# Altium PCB BaseBoard.PcbDoc
Units mm, origin at the board's own origin, x right, y up, seen from the top; angles counter-clockwise.
Board outline 100 x 99.75 mm, 2 copper layers (Top Layer, Bottom Layer), stack 1.57 mm thick; 52 components, 53 nets, 219 pads, 281 vias.
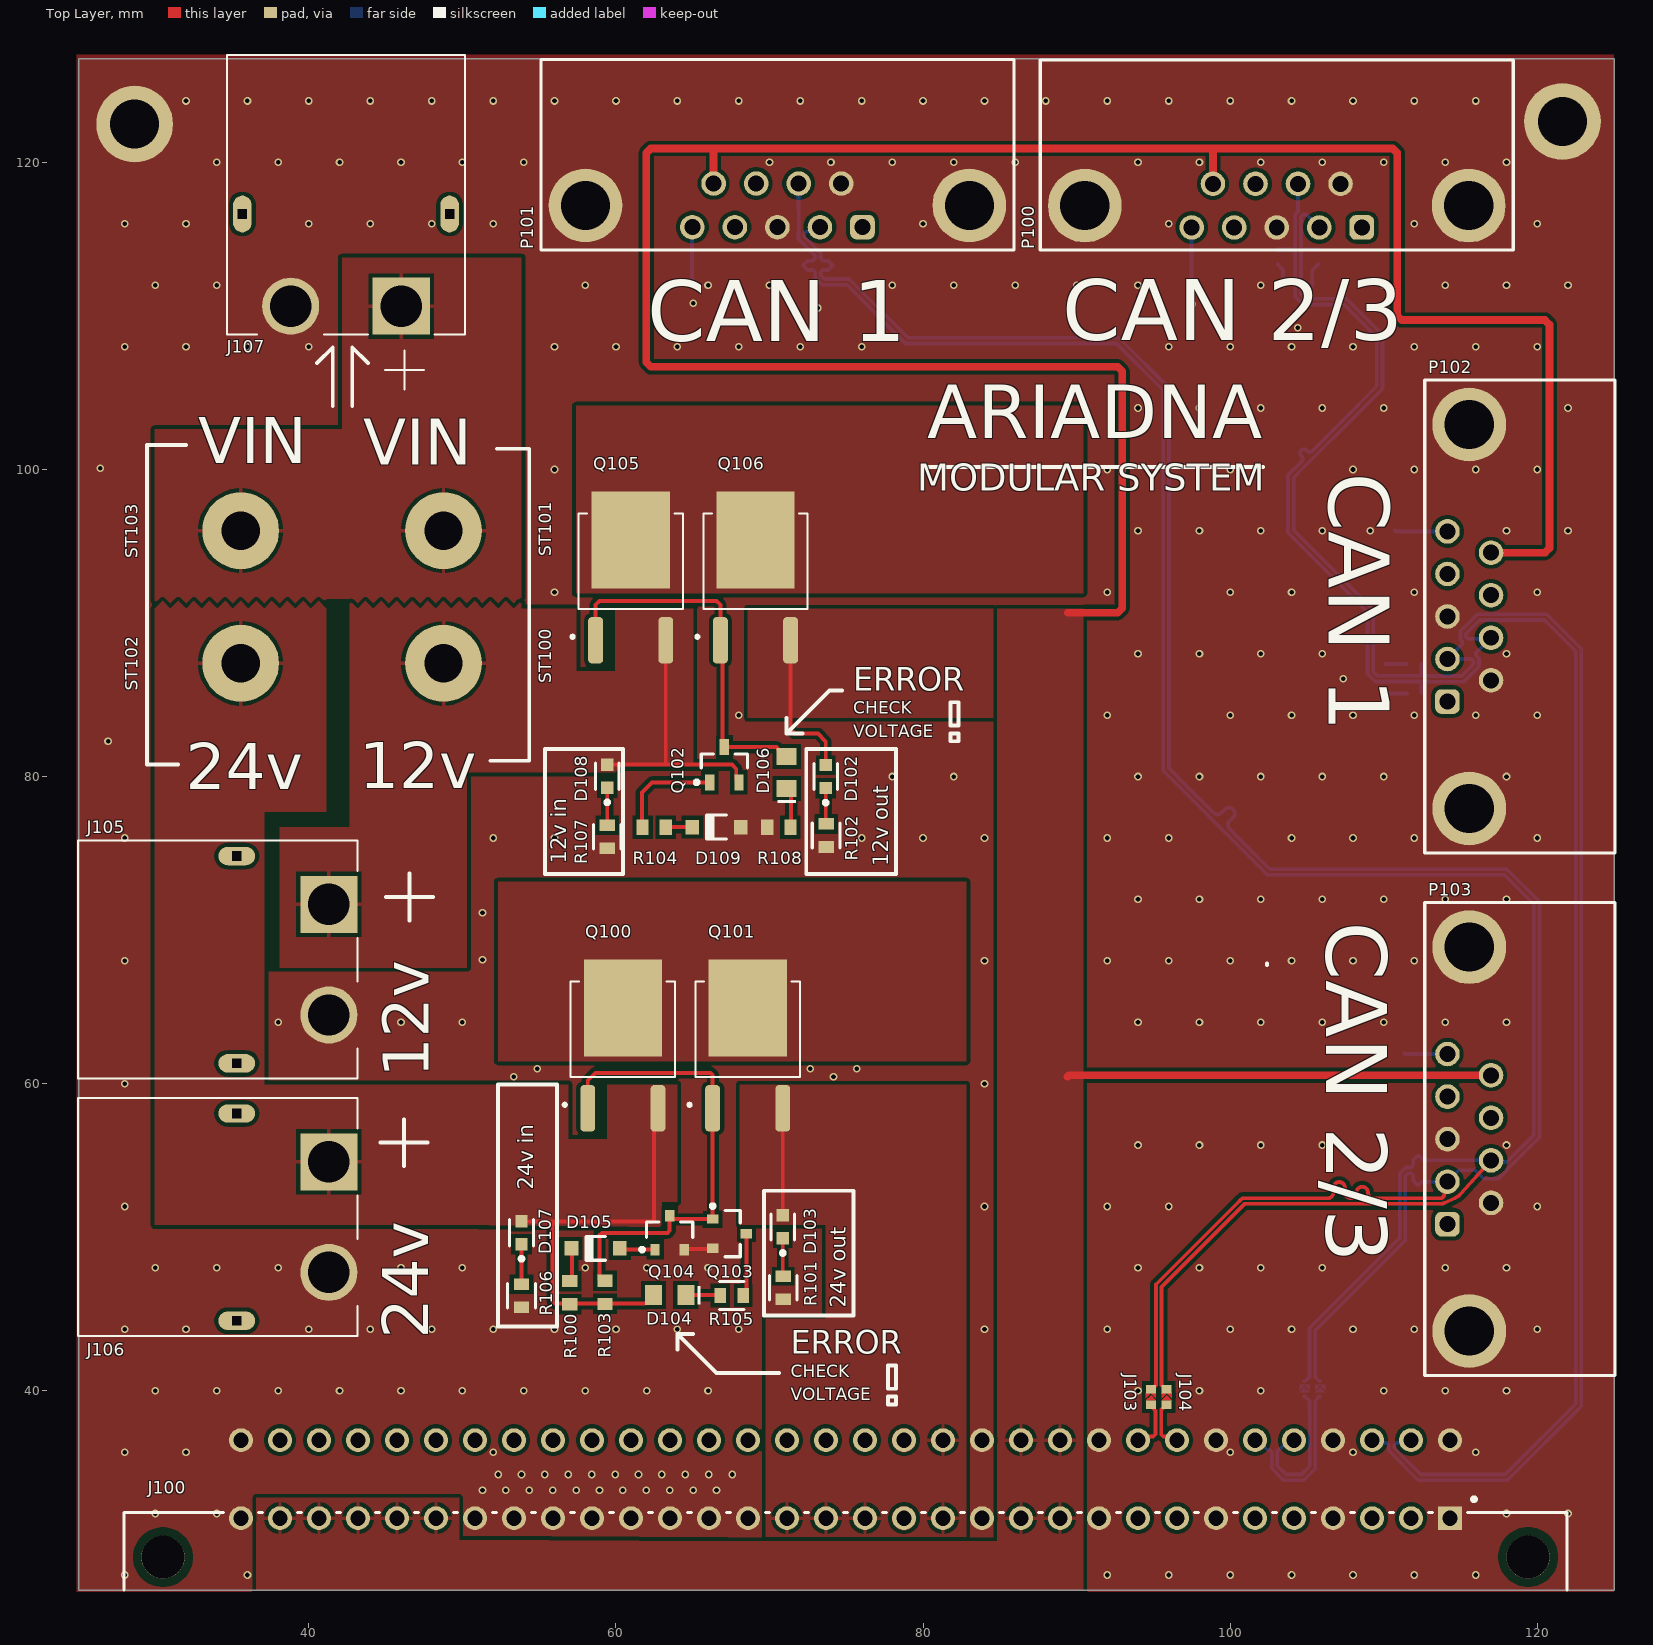
[diagram p0: Top Layer view]
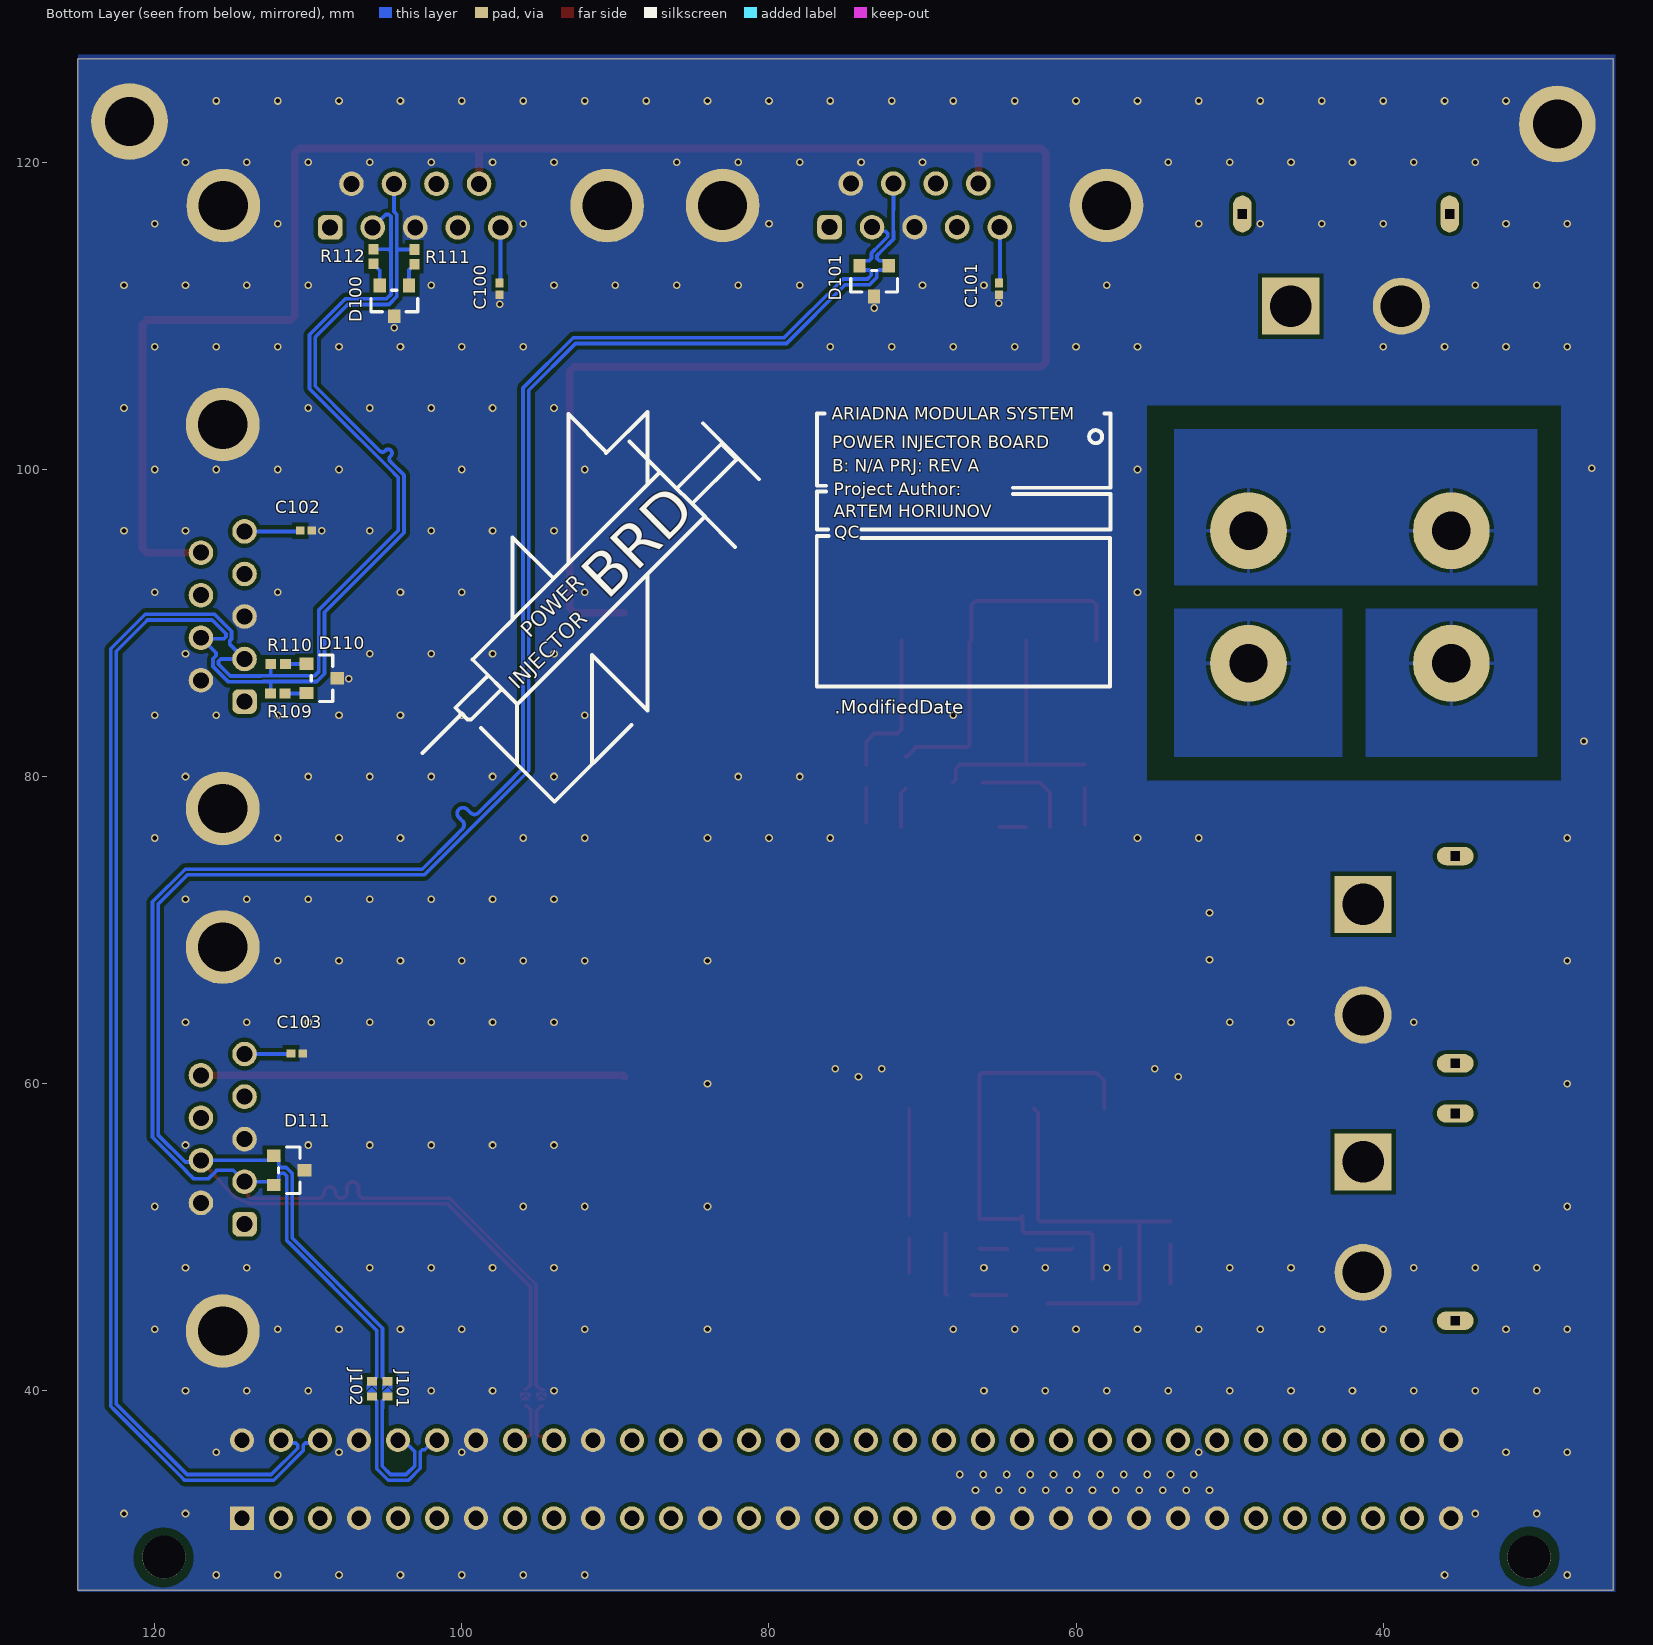
[diagram p1: Bottom Layer view, seen from below]
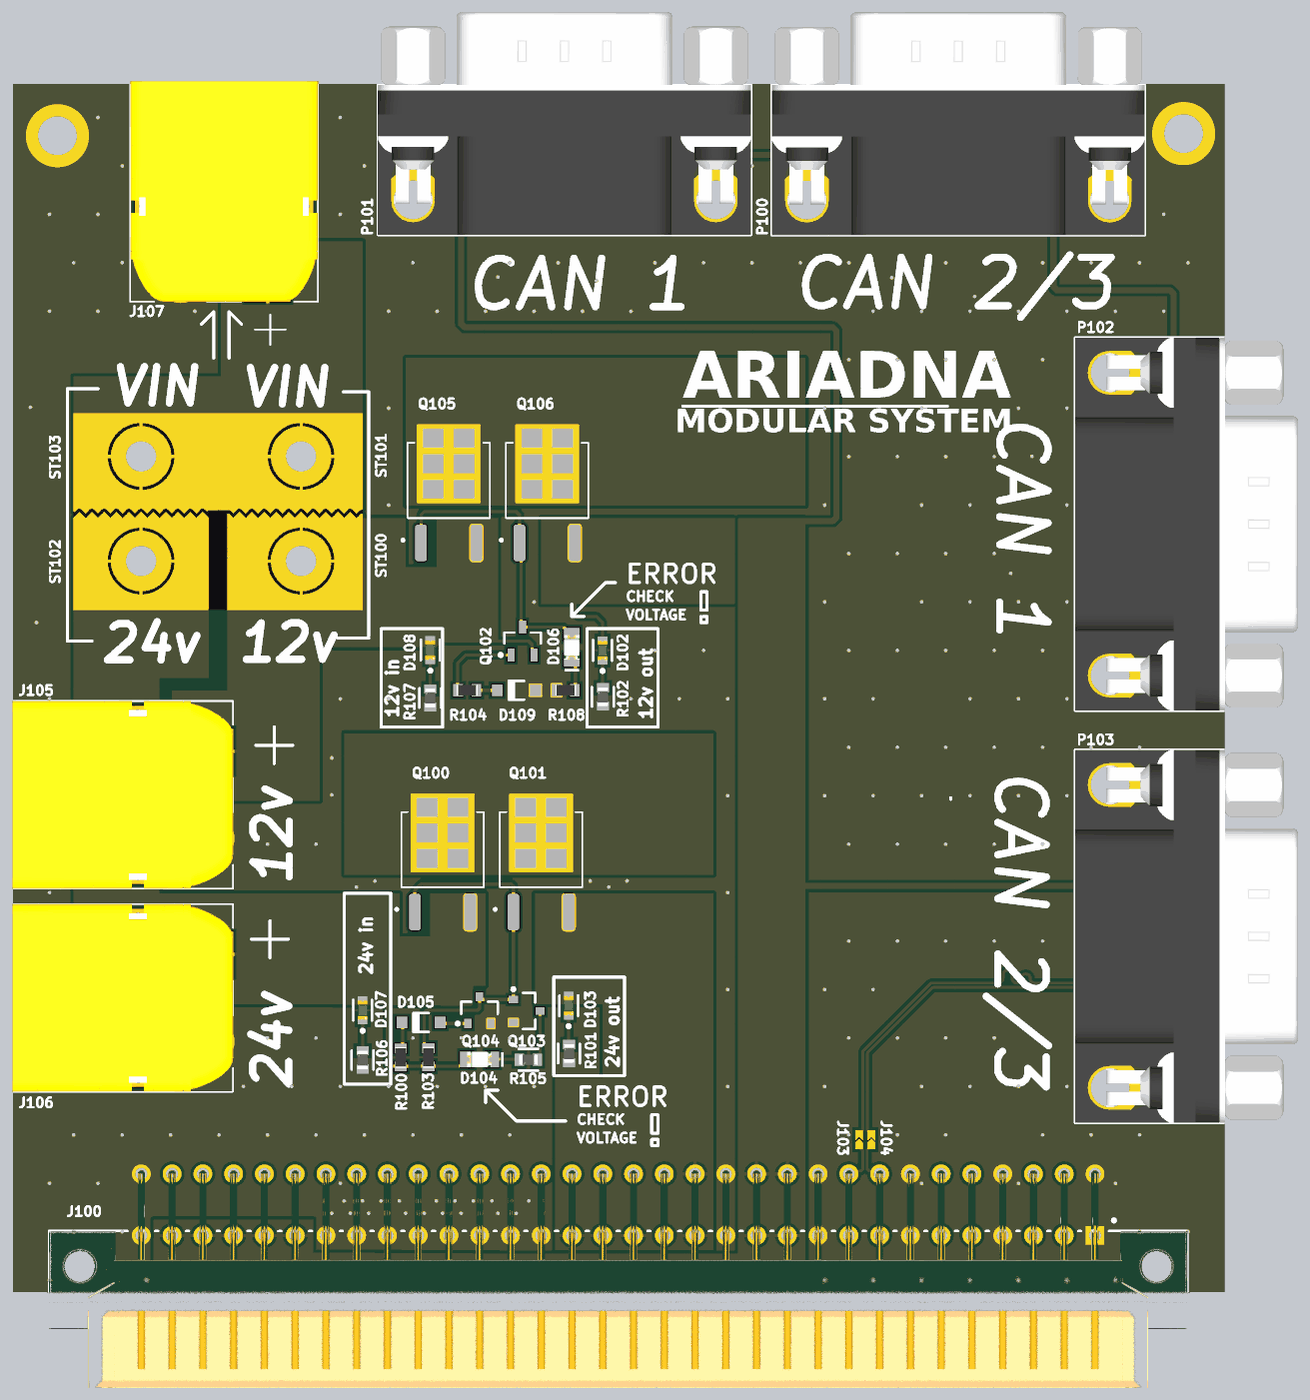
[diagram p2: 3D render of the assembled board from above, using the file's embedded part models]
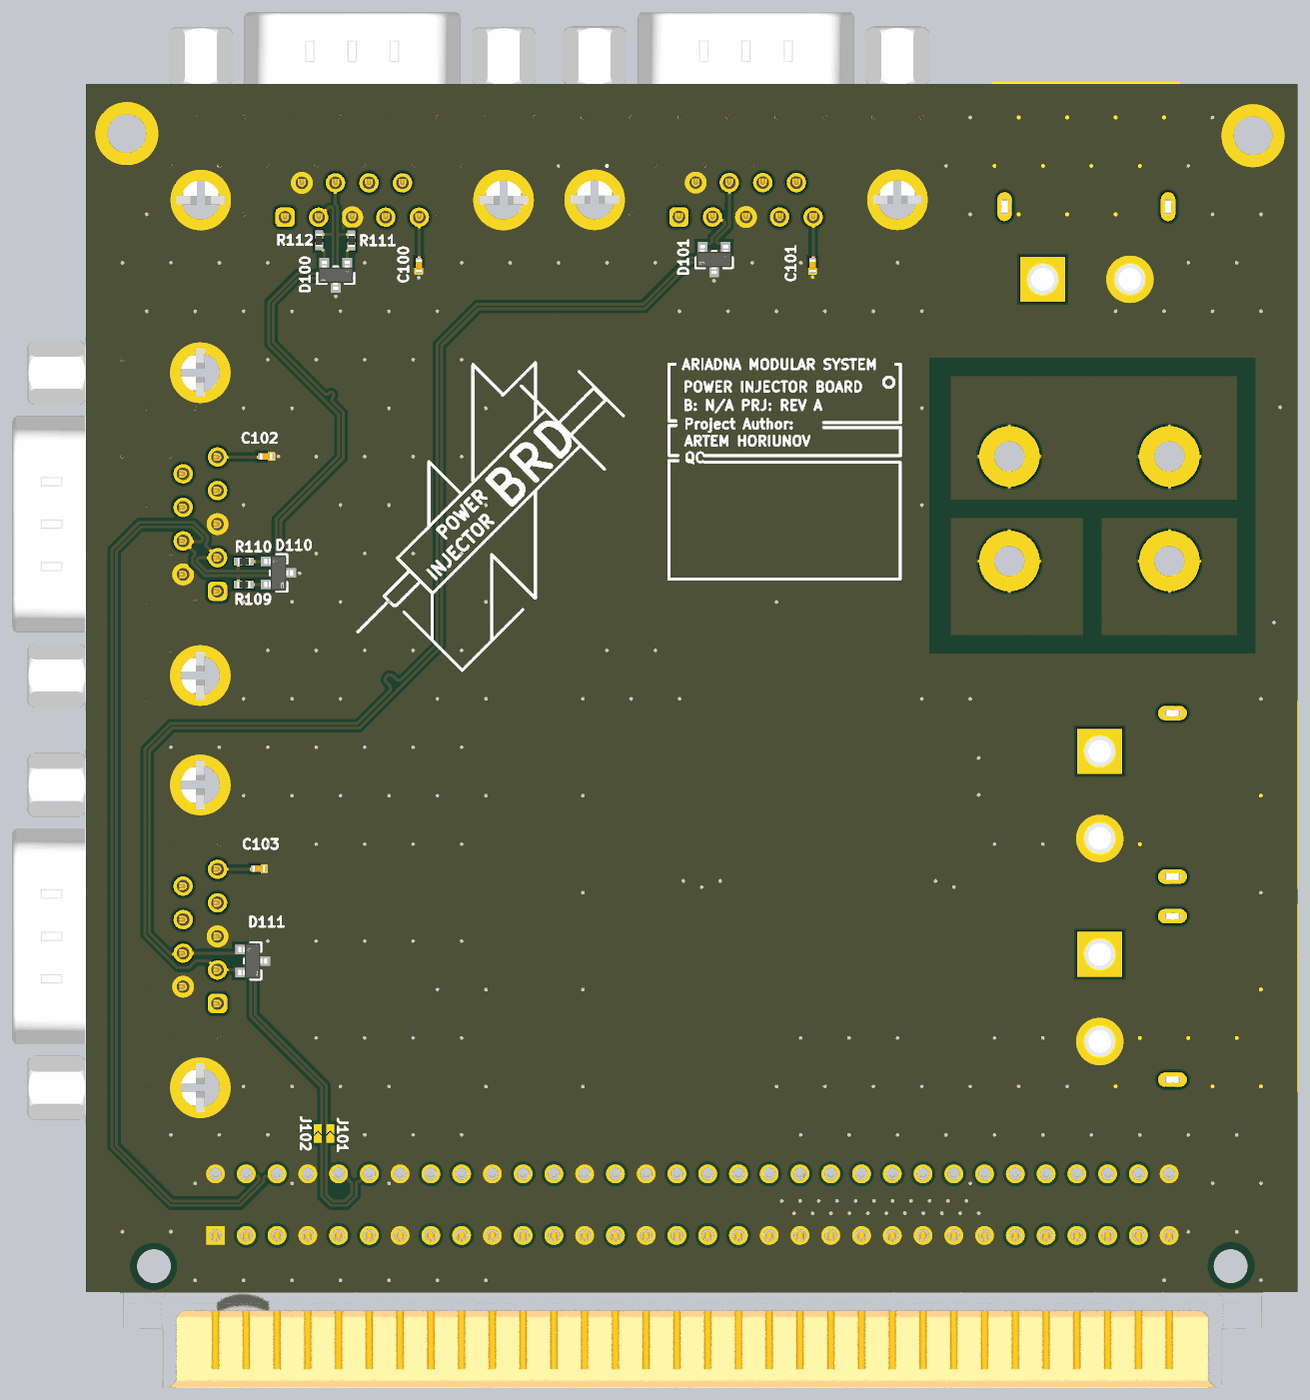
[diagram p3: 3D render of the assembled board from below, using the file's embedded part models]

## Layer stack, top to bottom
Top Solder: solder mask 0.0127, Solder Resist, Dk 3.8
Top Layer: signal copper 0.035
Dielectric: core 1.5, FR-4, Dk 4.5
Bottom Layer: signal copper 0.035
Bottom Solder: solder mask 0.0127, Solder Resist, Dk 3.8

## Board outline
25,27 125,27 125,126.746 25,126.746

## Design rules (kind name [scope] priority, off if disabled: settings)
Clearance [All] p1: gap=0.254 ignorepadtopadclearanceinfootprint=TRUE except(0: Arc-Hole Track-Hole SMDPad-Hole THPad-Hole Via-Hole Fill-Hole Poly-Hole Region-Hole Text-Hole; 0.127: Arc-Arc Arc-Track Track-Track SMDPad-SMDPad; 0.2: Arc-SMDPad Track-SMDPad; 0.5: THPad-THPad)
DiffPairsRouting USB [All] p1: maxlimit=0.127 minlimit=0.127 mostfreqgap=0.127 toplayer_minwidth=0.24 toplayer_maxwidth=0.24 toplayer_prefwidth=0.24 bottomlayer_minwidth=0.24 bottomlayer_maxwidth=0.24 bottomlayer_prefwidth=0.24 impedanceprofiledriven=TRUE maxuncoupledlength=12.7
DiffPairsRouting CAN [All] p2: maxlimit=0.127 minlimit=0.127 mostfreqgap=0.127 toplayer_minwidth=0.123 toplayer_maxwidth=0.123 toplayer_prefwidth=0.123 bottomlayer_minwidth=0.123 bottomlayer_maxwidth=0.123 bottomlayer_prefwidth=0.123 impedanceprofiledriven=TRUE impedanceprofileid={9E27E0D8-7AC4-4884-A1A0-CA4D147F4CC9} impedanceprofilevalue=120.000000 maxuncoupledlength=12.7
HoleSize [All] p1: absolutevalues=TRUE maxlimit=6.3 minlimit=0.3 maxpercent=80.000 minpercent=20.000
MinimumSolderMaskSliver [All] p1: minsoldermaskwidth=0.127
PolygonConnect GND_polygon [InNet('GND')] p1: connectstyle=Direct reliefconductorwidth=0.254 reliefentries=4 polygonreliefangle="90 Angle" airgapwidth=0.254
PolygonConnect "STM32-no releaf" [HasFootprint('STM-LQFP64_M')] p2: connectstyle=Direct reliefconductorwidth=0.254 reliefentries=4 polygonreliefangle="90 Angle" airgapwidth=0.254
PolygonConnect [All] p3: thpad.connectstyle=Relief thpad.reliefconductorwidth=0.254 thpad.reliefentries=4 thpad.polygonreliefangle="90 Angle" thpad.airgapwidth=0.254 smdpad.connectstyle=Direct smdpad.reliefconductorwidth=0.254 smdpad.reliefentries=4 smdpad.polygonreliefangle="90 Angle" smdpad.airgapwidth=0.254 via.connectstyle=Direct via.reliefconductorwidth=0.254 via.reliefentries=4 via.polygonreliefangle="90 Angle" via.airgapwidth=0.254
RoutingVias [All] p1: holewidth=0.3 width=0.5 viastyle="Through Hole" minholewidth=0.3 minwidth=0.5 maxholewidth=0.5 maxwidth=0.7
SilkToSilkClearance [All] p1: silktosilkclearance=0.001
SilkToSolderMaskClearance [IsPad] p1: minsilkscreentomaskgap=0.1 clearancetoexposedcopper=TRUE
SolderMaskExpansion SolderMaskExpansion_Vias [IsVia] p1: expansion=0.102 istentingtop=TRUE
SolderMaskExpansion [All] p2: expansion=0.102 istentingtop=FALSE
SupplyNets "Schematic Supply Nets_8" [InNet('Unprotec 24v')] p1: voltage=0.000
SupplyNets "Schematic Supply Nets_7" [InNet('Unprotec 12v')] p2: voltage=0.000
SupplyNets "Schematic Supply Nets_3" [InNet('GND')] p3: voltage=0.000
SupplyNets "Schematic Supply Nets_2" [InNet('+12')] p4: voltage=0.000
SupplyNets "Schematic Supply Nets_1" [InNet('12v')] p5: voltage=0.000
SupplyNets "Schematic Supply Nets" [InNet('24v')] p6: voltage=0.000
Width [All] p1: maxlimit=2.54 minlimit=0.254 preferedwidth=0.5 minimp=50.000000 maximp=50.000000 favimp=50.000000
25 further rules are at their usual default settings.

## Classes and differential pairs
differential pair class CAN: CAN1 CANSW
differential pair CANSW: +CANSW_P -CANSW_N
differential pair CAN3: +CAN3_P -CAN3_N
differential pair CAN2: +CAN2_P -CAN2_N
differential pair CAN1: +CAN1_P -CAN1_N

## Components (designator, comment, footprint, x,y, rotation, side; value= is the part's Value field where it differs from the comment)
C100 "Capacitor 10 pF +/- 0.25 pF 50 V 0402" CAPC1005X55X30LL05T10 97.536,111.76 r90 bottom value=10pF
C101 "Capacitor 10 pF +/- 0.25 pF 50 V 0402" CAPC1005X55X30LL05T10 65.024,111.76 r90 bottom value=10pF
C102 "Capacitor 10 pF +/- 0.25 pF 50 V 0402" CAPC1005X55X30LL05T10 110.144,96.012 r0 bottom value=10pF
C103 "Capacitor 10 pF +/- 0.25 pF 50 V 0402" CAPC1005X55X30LL05T10 110.744,61.976 r0 bottom value=10pF
D100 "ESDA6V1L-TP" FP-SOT-23-MFG 104.394,110.973 r270 bottom
D101 "ESDA6V1L-TP" FP-SOT-23-MFG 73.152,112.268 r270 bottom
D102 "Green LED" FP-HSME-C191-MFG 73.66,79.998 r90 top
D103 "Green LED" FP-HSME-C191-MFG 70.866,50.673 r90 top
D104 "Flashing RED" WL-SMCW_0805_150080xx75000 63.5,46.228 r180 top
D105 "BZT52C16-7-F" DIOD-SOD123-2_V 58.674,49.276 r180 top
D106 "Flashing RED" WL-SMCW_0805_150080xx75000 71.12,80.264 r90 top
D107 "Green LED" FP-HSME-C191-MFG 53.848,50.292 r90 top
D108 "Green LED" FP-HSME-C191-MFG 59.436,80.022 r90 top
D109 "BZT52C16-7-F" DIOD-SOD123-2_V 66.548,76.708 r180 top
D110 "ESDA6V1L-TP" FP-SOT-23-MFG 109.109,86.396 r180 bottom
D111 "ESDA6V1L-TP" FP-SOT-23-MFG 111.252,54.356 r180 bottom
J100 "09 03 164 6921" FP-09_03_164_6921-MFG 74.95,25.56 r0 top
J101 "JUMPER" JUMPER 104.845,40.074 r180 bottom
J102 "JUMPER" JUMPER 105.861,40.074 r180 bottom
J103 "JUMPER" JUMPER 95.86,39.548 r0 top
J104 "JUMPER" JUMPER 94.844,39.548 r0 top
J105 "XT60PW-M" AMASS_XT60PW-M 35.306,68.072 r90 top
J106 "XT60PW-M" AMASS_XT60PW-M 35.306,51.308 r90 top
J107 "XT60PW-M" AMASS_XT60PW-M 42.418,116.637 r0 top
P100 "618009231221" 618009231221 103.035,120.48 r180 top
P101 "618009231221" 618009231221 70.515,120.499 r180 top
P102 "618009231221" 618009231221 118.872,90.424 r90 top
P103 "618009231221" 618009231221 118.872,56.388 r90 top
Q100 "AOD417" DPAK228P994X240_3N 60.452,62.484 r0 top
Q101 "AOD417" DPAK228P994X240_3N 68.58,62.484 r0 top
Q102 "BC857C" INF-SOT23_N 67.056,80.772 r90 top
Q103 "BC847C" INF-SOT23_L 67.394,50.226 r0 top
Q104 "BC847C" INF-SOT23_L 63.5,50.292 r90 top
Q105 "AOD417" DPAK228P994X240_3N 60.96,92.964 r0 top
Q106 "AOD417" DPAK228P994X240_3N 69.088,92.964 r0 top
R100 "Resistor 1k +/-1% 0603 100 mW" RESC1608X55X25ML10T15 56.998,46.392 r270 top value=1k (schematic designator R102)
R101 "680R" FP-CRCW0603-e3-MFG 70.891,46.711 r90 top
R102 "680R" FP-CRCW0603-e3-MFG 73.685,76.163 r90 top (schematic designator R100)
R103 "Resistor 1k +/-1% 0603 100 mW" RESC1608X55X25ML10T15 59.284,46.406 r270 top value=1k
R104 "Resistor 1k +/-1% 0603 100 mW" RESC1608X55X25ML10T15 62.484,76.708 r180 top value=1k
R105 "680R" FP-CRCW0603-e3-MFG 67.539,46.203 r180 top
R106 "680R" FP-CRCW0603-e3-MFG 53.848,46.19 r90 top
R107 "680R" FP-CRCW0603-e3-MFG 59.436,76.073 r90 top
R108 "Resistor 1k +/-1% 0603 100 mW" RESC1608X55X25ML10T15 70.612,76.708 r0 top value=1k
R109 "Resistor 0R 0402 63 mW" RESC1005X40X25ML05T10 111.989,85.42 r0 bottom value=0
R110 "Resistor 0R 0402 63 mW" RESC1005X40X25ML05T10 111.963,87.325 r0 bottom value=0
R111 "Resistor 0R 0402 63 mW" RESC1005X40X25ML05T10 103.099,113.843 r90 bottom value=0
R112 "Resistor 0R 0402 63 mW" RESC1005X40X25ML05T10 105.766,113.868 r90 bottom value=0
ST100 "PTH-M2D5X5" PTH-M2D5X5 48.768,87.376 r0 top
ST101 "PTH-M2D5X5" PTH-M2D5X5 48.768,96.012 r0 top
ST102 "PTH-M2D5X5" PTH-M2D5X5 35.56,87.376 r0 top
ST103 "PTH-M2D5X5" PTH-M2D5X5 35.56,96.012 r0 top

## Footprints (in the part's own frame and the unit in brackets; to place one, negate y for a bottom-side part, rotate by r counter-clockwise, add the part's x,y. Pads: shape width x height; smd on the part's side, far side on the other; paste and mask are expansions set on the pad)
618009231221 [mm] "9 pins, right angled, 8.08mm, with hex screw"
  rrect50% 1.6x1.6 hole 1.04: 1(-5.54,4.72)
  round 1.6 hole 1.04: 2(-2.77,4.72) 3(0,4.72) 4(2.77,4.72) 5(5.54,4.72) 6(-4.155,1.88) 7(-1.385,1.88) 8(1.385,1.88) 9(4.155,1.88)
  round 4.8 hole 3.2: M1(-12.5,3.3) M2(12.5,3.3)
  silkscreen extent -15.4,-6.2 15.4,6.2, body extent -15.4,-12.2 15.4,6.2, height 12.57
AMASS_XT60PW-M [mm]
  rect 3.716x3.716 / inner round 3.716 / far side rect 3.716x3.716 hole 2.7: 1(3.6,-6)
  round 3.716 hole 2.7: 2(-3.6,-6)
  oval 1.2x2.4 hole 0.6 square: S1(6.75,0) S2(-6.75,0)
  silkscreen extent -7.75,-7.85 7.75,10.35, body extent -7.75,-7.85 7.75,10.35, height 8.4
CAPC1005X55X30LL05T10 [mm] "Chip Capacitor, 2-Leads, Body 1.05x0.55mm, IPC High Density"
  rect 0.56x0.52 smd: 1(-0.38,0) 2(0.38,0)
  body extent -0.53,-0.28 0.53,0.28, height 0.55
DIOD-SOD123-2_V [mm] "SOD123, 2-Leads, Body 2.7x1.55mm, Height 1.45mm"
  rect 0.9x0.95 smd: 1(-1.575,0) 2(1.575,0)
  silkscreen extent -0.64,-0.82 0.64,0.77, body extent -1.35,-0.77 1.35,0.77, height 1.45
DPAK228P994X240_3N [mm]
  rrect50% 0.97x3.02 smd: 1(-2.286,-4.09) 3(2.286,-4.09)
  rect 5.09x6.32 smd paste-4: 4(0,2.44)
  silkscreen extent -3.89,-3.96 3.4,4.18
FP-09_03_164_6921-MFG [mm]
  rect 1.55x1.55 hole 1 paste-2539.97 mask+0: A1(39.37,6.14)
  round 1.55 hole 1 paste-2539.97 mask+0: A2(36.83,6.14) A3(34.29,6.14) A4(31.75,6.14) A5(29.21,6.14) A6(26.67,6.14) A7(24.13,6.14) A8(21.59,6.14) A9(19.05,6.14) A10(16.51,6.14) A11(13.97,6.14) A12(11.43,6.14) A13(8.89,6.14) A14(6.35,6.14) A15(3.81,6.14) A16(1.27,6.14) A17(-1.27,6.14) A18(-3.81,6.14) A19(-6.35,6.14) A20(-8.89,6.14) A21(-11.43,6.14) A22(-13.97,6.14) A23(-16.51,6.14) A24(-19.05,6.14) A25(-21.59,6.14) A26(-24.13,6.14) A27(-26.67,6.14) A28(-29.21,6.14) A29(-31.75,6.14) A30(-34.29,6.14) A31(-36.83,6.14) A32(-39.37,6.14) C1(39.37,11.22) C2(36.83,11.22) C3(34.29,11.22) C4(31.75,11.22) C5(29.21,11.22) C6(26.67,11.22) C7(24.13,11.22) C8(21.59,11.22) C9(19.05,11.22) C10(16.51,11.22) C11(13.97,11.22) C12(11.43,11.22) C13(8.89,11.22) C14(6.35,11.22) C15(3.81,11.22) C16(1.27,11.22) C17(-1.27,11.22) C18(-3.81,11.22) C19(-6.35,11.22) C20(-8.89,11.22) C21(-11.43,11.22) C22(-13.97,11.22) C23(-16.51,11.22) C24(-19.05,11.22) C25(-21.59,11.22) C26(-24.13,11.22) C27(-26.67,11.22) C28(-29.21,11.22) C29(-31.75,11.22) C30(-34.29,11.22) C31(-36.83,11.22) C32(-39.37,11.22)
  round 2.8 hole 2.8 unplated paste-2539.97 mask+0: ""(-44.45,3.6) ""(44.45,3.6)
  silkscreen extent -47,1.45 47,7.5, body extent -47.1,-6.6 47.1,12.09, height 0.25
FP-CRCW0603-e3-MFG [mm]
  rect 0.75x1 smd paste+0 mask+0: 1(-0.75,0) 2(0.75,0)
  silkscreen extent -0.8,-0.9 0.8,0.9, body extent -1.22,-0.6 1.22,0.6, height 0.25
FP-HSME-C191-MFG [mm]
  rect 0.8x0.8 smd paste+0 mask+0: 1(-0.75,0) 2(0.75,0)
  silkscreen extent -1.82,-0.77 0.85,0.77, body extent -1.25,-0.55 1.25,0.55, height 0.25
FP-SOT-23-MFG [mm]
  rect 0.9x0.8 smd paste+0 mask+0: 1(-1,0.95) 2(-1,-0.95) 3(1,0)
  silkscreen extent -0.7,-1.52 0.7,1.52, body extent -1.2,-1.46 1.2,1.46, height 1.25
INF-SOT23_L [mm] "SOT23, 3-Leads, Body 2.9x1.3 mm, Pitch 0.95 mm, IPC High Density"
  rect 0.75x0.6 smd: 1(-1.1,0.95) 2(-1.1,-0.95) 3(1.1,0)
  silkscreen extent -1.22,-1.5 0.7,1.92, body extent -0.7,-1.5 0.7,1.5, height 1.1
INF-SOT23_N [mm] "SOT23, 3-Leads, Body 2.9x1.3 mm, Pitch 0.95 mm, IPC Medium Density"
  rect 1.05x0.6 smd: 1(-1.15,0.95) 2(-1.15,-0.95) 3(1.15,0)
  silkscreen extent -1.27,-1.5 0.7,1.92, body extent -0.7,-1.5 0.7,1.5, height 1.1
JUMPER [mm]
  rect 0.65x0.55 smd paste-2.54 mask-2.54: 1(0,-0.45) 2(0,0.55)
  Top Layer region: -0.325,-0.041 0,0.284 0.325,-0.041 0.325,0.317 -0.325,0.318
  Top Layer region: -0.325,-0.175 0.003,0.152 0.325,-0.175
PTH-M2D5X5 [mm]
  round 5 hole 2.5: 1(0,0)
RESC1005X40X25ML05T10 [mm] "Chip Resistor, 2-Leads, Body 1.05x0.55mm, IPC Low Density"
  rect 0.7x0.65 smd: 1(-0.475,0) 2(0.475,0)
  body extent -0.53,-0.28 0.53,0.28, height 0.4
RESC1608X55X25ML10T15 [mm] "Chip Resistor, 2-Leads, Body 1.70x0.90mm, IPC Low Density"
  rect 0.8x1 smd: 1(-0.75,0) 2(0.75,0)
  body extent -0.85,-0.45 0.85,0.45, height 0.55
WL-SMCW_0805_150080xx75000 [mm] "SMD Mono-color Chip LED, body 2.0x1.25mm"
  rect 1.1x1.3 smd: 1(-1.05,0) 2(1.05,0)
  silkscreen extent -2,-0.6 -1.8,0.6, body extent -1,-0.63 1,0.62, height 0.7

## Part data
C100 C101 C102 C103: library part CMP-001-00011-6, "Chip Capacitor, 10 pF, +/- 0.25 pF, 50 V, 0402 (1005 Metric)", Capacitor Type=Ceramic, Case/Package=0402, Max Operating Temperature=125°C, Min Operating Temperature=-55°C, Tolerance=0.25%, Voltage Rating=50V, Mounting Technology=SM, Pins=2, RoHS Compliant=True
D100 D101 D110 D111: library part CMP-56244-000002-1, "TVS DIODE 5.25V SOT23", Breakdown Voltage=6.65V, Capacitance=140pF, Case/Package=SOT-23, Leakage Current=20uA, Max Breakdown Voltage=7.2V, Max Operating Temperature=150°C, Min Breakdown Voltage=6.1V, Min Operating Temperature=-55°C, Package Quantity=1, Peak Pulse Power=300W, Power Line Protection=No, Reverse Standoff Voltage=5.25V, Composition=Zener, Depth=1.4mm, Direction=Unidirectional, Element Configuration="Common Anode", Lead Free="Lead Free", Length=3.04mm, Mount="Surface Mount", Number of Channels=2, Number of Pins=3, Number of Unidirectional Channels=2, Packaging="Tape and Reel", Power Dissipation=300W, Radiation Hardening=No, Termination=SMD/SMT, Working Voltage=5.25V
D102 D103 D107 D108: library part CMP-18399-000013-1, "LED GREEN DIFFUSED 0603 SMD", Colour=Green, Forward Current=20mA, Forward Voltage=2.1V, Manufacturer=Broadcom, Manufacturer Part Number=HSME-C191, Max Junction Temp=+95°C, Package=0, Power Dissipation=52mW, Reverse Voltage=5V, Temperature="-40°C to +85°C", Temperature Range High=+85°C, Temperature Range Low=-40°C, Automotive=No, Category=Diode, ComponentLink2Description=Datasheet, ComponentLink2URL=https://docs.broadcom.com/docs/AV02-0976EN, Device Class L1=Optoelectronics, Device Class L2=LEDs, Device Class L3=unset, Digikey Description="LED GREEN DIFFUSED 0603 SMD", Height=0.7mm, Lead Free=Yes, Led Orientation="Top View", Luminous Intensity=50mcd, Mouser Description="Standard LEDs - SMD AlInGaP Green", Octopart=https://octopart.com/hsme-c191-broadcom-71131261, Peak Emmision Wavelength=570nm, RoHS=TRUE, Viewing Angle=170°, Wavelength=572nm
D104 D106: library part CMP-1426-00010-4, "Led, Red, 630 Nm, 1.9 V, 30 Ma, 60 Mcd Rohs Compliant: Yes", Case Code (Imperial)=0805, Case Code (Metric)=2012, Color=Red, Forward Current=100mA, Forward Voltage=1.9V, Max Junction Temperature (Tj)=95°C, Max Operating Temperature=85°C, Max Reverse Voltage (DC)=5V, Min Operating Temperature=-40°C, Power Dissipation=72mW, Test Current=20mA, Case/Package=0805, Dominant Wavelength=630nm, Height=700µm, Length=2mm, Lens Style="Clear, Rectangular", Luminous Intensity=60mcd, Mount="Surface Mount", Packaging="Tape and Reel", Peak Wavelength=645nm, REACH SVHC=Unknown, Reverse Voltage=5V, RoHS=Compliant, Viewing Angle=140°, Wavelength=630nm, Width=1.25mm
D105 D109: library part CMP-0860-00001-1, "Surface Mount Zener Diode, 16 V, -65 to 125 degC, SOD123, RoHS, Tape and Reel", Manufacturer="Diodes Inc", Maximum Reverse Current="0.1 uA", Operating Temperature="-65 to 150 degC", Power Max="500 mW", Voltage Zener="16 V Typ.", ComponentLink1Description="Manufacturer URL", ComponentLink1URL=http://www.diodes.com/, ComponentLink2Description=Datasheet, ComponentLink2URL=http://www.diodes.com/datasheets/ds18004.pdf, ComponentLink3Description="Package Specification", ComponentLink3URL=http://www.diodes.com/datasheets/ap02002.pdf, DatasheetVersion="Rev. 37-2", Maximum Zener Impedance f="1 kHz ZZK=200 Ohm", Mounting Technology="Surface Mount", PackageDescription="2-Pin SOD123, Body 2.7 x 1.55 mm, Height 1.45 mm", PackageReference=SOD123, PackageVersion="Rev. 79", Packing="Tape and Reel", PartNumber=BZT52C16-7-F, RoHS=TRUE, Tol V="5.56% Typ."
J100: library part CMP-33111-000001-1, "CONN DIN HDR 96POS PCB RA", Current Rating=2A, Manufacturer=Harting, Package=0, Temperature="-55°C to +125°C", Temperature Range High=+125°C, Temperature Range Low=-55°C, Automotive=No, Category=Conn, ComponentLink2Description=Datasheet, ComponentLink2URL=https://b2b.harting.com/files/download/PRD/PDF_DS/09031200203_100580339DRW000B.pdf, Conn Gender=Male, Conn Orientation="Right Angle", Contact Material=Gold,Nickel, Device Class L1=Connectors, Device Class L2="Backplane Connectors", Device Class L3=unset, Digikey Description="CONN DIN HDR 96POS PCB RA", Footprint Url=https://b2b.harting.com/files/download/PRD/PDF_TS/0903164X921_100072506DRW176A.pdf, Height=11mm, Lead Free=Yes, Manufacturer Part Number="09 03 164 6921", Mouser Description="Conn DIN 41612 M 64 POS 2.54mm Solder RA Thru-Hole Box", Number of Contacts=64, Number of Rows=2, Octopart=https://octopart.com/09031646921-harting+elektronik-42933, Pitch=2.54mm, RoHS=TRUE
J101 J102 J103 J104: library part CMP-009-00061-2, Pins=2
J105 J106 J107: library part CMP-002-00072-1, "Socket, DC supply, male, PIN: 2", Case/Package=Package, Availability="Not in stock", Check_prices=https://www.snapeda.com/parts/XT60PW-M/AMASS/view-part/?ref=eda, Component Type=Standard, Design Item ID=XT60PW-M, MF=AMASS, MP=XT60PW-M, Pins=2, Price=None, SnapEDA_Link=https://www.snapeda.com/parts/XT60PW-M/AMASS/view-part/?ref=snap, Source=XT60PW-M.SchLib
P100 P101 P102 P103: library part CMP-1502-00284-2, Contact Resistance=30mΩ, Current Rating=3A, Insulation Resistance=5GΩ, Max Operating Temperature=105°C, Min Operating Temperature=-55°C, Operating Supply Voltage=125V, Contact Material=Gold, Contact Plating=Gold, Depth=18.5mm, Gender=Male, Height=12.7mm, Housing Material=Steel, Insulation Material=PBT, Length=30.8mm, Mount="Through Hole", NexarPartId=22865742, Number of Contacts=9, Number of Pins=9, Number of Rows=2, Orientation="Right Angle", Pitch=2.77mm, REACH SVHC=Unknown, RoHS=Compliant, Termination=SMD/SMT, Voltage Rating=125V, Width=12.5mm
Q100 Q101 Q105 Q106: "P-Channel 30V 25A _Ta_ 2.5W _Ta_, 50W _Tc_ Surface Mount TO-252, _D-Pak_", Package="TO-252 Alpha &amp; Omega Semiconductor", Availability=Unavailable, MF="Alpha &", MP=AOD417, Price=None, SnapEDA_Link=https://www.snapeda.com/parts/AOD417/Alpha%20%26%20Omega%20Semiconductor%20Inc./view-part/454934/?ref=snap
Q102: library part CMP-1177-00039-1, "PNP Silicon AF Transistor, 45 V VCEO, 100 mA IC, SOT23, Reel, Green", Manufacturer=Infineon, ComponentLink1Description="Manufacturer URL", ComponentLink1URL=http://www.infineon.com/, ComponentLink2Description=Datasheet, ComponentLink2URL=http://www.infineon.com/dgdl/bc857series_bc858series_bc859series_bc860series.pdf?folderId=db3a304314dca389011541d30fa21656&fileId=db3a304314dca389011541da0e3a1661, ComponentLink3Description="Package Specification", ComponentLink3URL=http://www.infineon.com/dgdl/SOT23-Package_Overview.pdf?folderId=db3a30431936bc4b0119532290053c66&fileId=db3a30431936bc4b0119533468123c85, fT (typ)="250Â MHz", Green=TRUE, IBM (max)="200Â mA", IC (max)="100Â mA", ICBO (max)="15Â nA", ICM (max)="200Â mA", Mounting Technology="Surface Mount", PackageDescription="3-Pin Small Outline Transistor Package, 1.3 x 2.9 mm Body, 0.95 mm Pitch", PackageReference=SOT23, PackageVersion=Apr-08, Packing=Reel, PartNumber=BC857C, Polarity=PNP, Ptot (max)="330Â mW", VCBO (max)="50Â V", VCEO (max)="45Â V", VEBO (max)="5Â V"
Q103 Q104: library part CMP-1177-00037-1, "NPN Silicon AF Transistor, 45 V VCEO, 100 mA IC, SOT23, Reel, Green", Manufacturer=Infineon, ComponentLink1Description="Manufacturer URL", ComponentLink1URL=http://www.infineon.com/, ComponentLink2Description=Datasheet, ComponentLink2URL=http://www.infineon.com/dgdl/bc847series_bc848series_bc849series_bc850series.pdf?folderId=db3a304314dca389011541d30fa21656&fileId=db3a304314dca389011541d4630a1657, ComponentLink3Description="Package Specification", ComponentLink3URL=http://www.infineon.com/dgdl/SOT23-Package_Overview.pdf?folderId=db3a30431936bc4b0119532290053c66&fileId=db3a30431936bc4b0119533468123c85, fT (typ)="250Â MHz", Green=TRUE, IBM (max)="200Â mA", IC (max)="100Â mA", ICBO (max)="15Â nA", ICM (max)="200Â mA", Mounting Technology="Surface Mount", PackageDescription="3-Pin Small Outline Transistor Package, 1.3 x 2.9 mm Body, 0.95 mm Pitch", PackageReference=SOT23, PackageVersion=Apr-08, Packing=Reel, PartNumber=BC847C, Polarity=NPN, Ptot (max)="330Â mW", VCBO (max)="50Â V", VCEO (max)="45Â V", VEBO (max)="6Â V"
R100 R103 R104 R108: library part CMP-009-00014-5, "Chip Resistor, 1 KOhm, +/-1%, 0.1 W, -55 to 155 degC, 0603 (1608 Metric)", Case/Package=0603, Max Operating Temperature=155°C, Min Operating Temperature=-55°C, Power=100mW, Tolerance=1%, Voltage Rating=50V, Mounting Technology=SM, Pins=2, RoHS Compliant=True
R101 R102 R105 R106 R107: library part CMP-2000-03529-2, "RES Thick Film, 680Ω, 1%, 0.1W, 100ppm/°C, 0603", Case Code (Imperial)=0603, Case Code (Metric)=1608, Max Operating Temperature=155°C, Max Power Dissipation=100mW, Min Operating Temperature=-55°C, Package Quantity=10, Temperature Coefficient=100ppm/°C, Tolerance=1%, Voltage Rating=75V, Case/Package=0603, Composition="Thick Film", Contact Plating=Tin, Depth=0.85mm, Features="Automotive AEC-Q200", Height=0.45mm, Lead Free="Lead Free", Length=1.55mm, Military Standard=Not, Number of Pins=2, Number of Terminations=2, Packaging="Tape and Reel", Power Rating=100mW, Radiation Hardening=No, Resistance=680R, Termination=SMD/SMT, Voltage Rating (DC)=75V, Weight=7.1E-05oz, Width=0.85mm, Working Voltage=75V
R109 R110 R111 R112: library part CMP-009-00004-5, "Chip Resistor, 0 Ohm, 0.063 W, -55 to 155 degC, 0402 (1005 Metric)", Case/Package=0402, Max Operating Temperature=155°C, Min Operating Temperature=-55°C, Power=63mW, Voltage Rating=50V, Mounting Technology=SM, Pins=2, RoHS Compliant=True
ST100 ST101 ST102 ST103: library part CMP-00028-00004-2, "M2 PTH (2.5mm), 5mm pad", Pins=1

## Free pads (board coordinates)
  round 5 hole 3.2: 7(28.656,122.49) 7(121.64,122.667)

## Via types
v1: diameter 0.5, hole 0.3, Top Layer to Bottom Layer, tented both sides, 281 vias

## Nets (pads, with @x,y where several pads share a name; then routed paths per layer and width w, separated by ;. In a path a pad name is that pad's centre, name@x,y a point inside that pad or via, vN(x,y) a via of type N, cw(c..) or ccw(c..) an arc to the next point about the centre after c; other vN are vias at no path point)
12v: D102.2 Q106.3 | length 10
  Top Layer w0.254: Q106.3 71.374,83.058 71.628,82.804 73.152,82.804 73.66,82.296 D102.2
24v: D103.2 J100.A14 J100.A16 J100.A17 J100.A18 J100.C14 Q101.3 | length 7
  Top Layer w0.254: D103.2 Q101.3
+12: J100.A11 J100.A12 J100.A27 J100.A28 J100.A29 J100.A30 J100.A31 J100.C11 J100.C12 P100.9 P101.9 P102.9 P103.9 | length 184.6
  Top Layer w0.5: P101.9@66.35,118.6 66.35,120.904 ; 89.408,60.452 89.499,60.543 P103.9 ; 89.432,90.673 92.671,90.673 92.964,90.966 92.964,106.387 92.671,106.68 62.269,106.68 61.976,106.973 61.976,120.611 62.269,120.904 66.35,120.904 ; P100.9 98.88,120.904 ; P102.9 120.502,94.579 120.795,94.872 120.795,109.435 120.502,109.728 111.182,109.728 110.889,110.021 110.889,120.611 110.596,120.904 98.88,120.904 ; 66.35,120.904 98.88,120.904
CAN1_N: J100.C3 P100.2 P102.2 R110.2 R112.2 | length 128.3
  Bottom Layer w0.24: R112.2 104.769,114.343 104.616,114.19 ; P100.2 104.956,116.609 104.757,116.609 104.616,116.468 104.616,114.19 ; J100.C3 109.42,36.6 110.185,36.6 110.326,36.459 110.326,36.108 112.258,34.177 118.057,34.177 118.272,34.392 122.654,38.774 122.869,38.989 122.869,88.319 120.62,90.567 116.107,90.567 114.997,89.458 114.997,88.954 115.125,88.826 115.125,88.627 P102.2 115.703,87.654 115.844,87.513 115.844,87.314 115.08,86.55 113.091,86.55 113.084,86.556 112.592,86.556 ; R110.2 112.451,87.312 112.451,86.697 112.592,86.556 ; 104.616,114.19 104.616,111.398 104.903,111.11 107.584,111.11 107.799,110.895 109.707,108.987 109.923,108.771 109.923,105.262 109.707,105.047 108.439,103.778 104.832,100.172 104.14,99.48 104.14,96.024 109.231,90.933 109.311,90.853 109.311,86.841 109.595,86.556 112.592,86.556
CAN1_P: J100.C2 P100.7 P102.7 R109.2 R111.2 | length 128.3
  Bottom Layer w0.24: R111.2 103.111,114.331 104.107,114.331 104.248,114.19 ; P100.7 104.42,116.792 104.248,116.62 104.248,114.19 ; J100.C2 111.6,36.6 110.835,36.6 110.694,36.459 110.694,36.26 112.41,34.544 117.904,34.544 118.851,35.49 121.868,38.508 122.501,39.141 122.501,88.166 120.644,90.024 120.468,90.2 116.259,90.2 115.365,89.305 115.365,89.106 115.506,88.965 P102.7@116.918,88.965 ; R109.2 112.451,85.433 112.451,86.048 112.592,86.189 ; P102.7 P102.7@116.918,88.965 ; 104.248,114.19 104.248,111.246 104.751,110.743 107.431,110.743 109.555,108.619 109.555,105.415 107.188,103.048 105.35,101.21 cw(c105.175,101.384) 105,101.21 104.971,101.239 ccw(c104.796,101.064) 104.621,101.239 ccw(c104.796,101.064) 104.621,100.89 104.651,100.86 cw(c104.476,100.685) 104.651,100.51 104.566,100.425 103.773,99.632 103.773,95.871 108.864,90.78 108.943,90.701 108.943,86.689 109.443,86.189 112.592,86.189 ; 112.592,86.189 112.932,86.189 112.939,86.182 115.232,86.182 116.212,87.162 116.212,87.665 116.015,87.862 116.015,88.062 P102.7@116.918,88.965
CAN2_N: J100.C6 J102.1 | length 10.8
  Bottom Layer w0.24: J100.C6 101.796,36.78 102.416,36.161 102.565,36.161 102.706,36.02 102.706,34.95 103.48,34.177 104.8,34.177 105.55,34.926 105.55,39.009 105.536,39.022 105.536,39.35 105.811,39.624 J102.1
CAN2_P: J100.C5 J101.1 | length 9.6
  Bottom Layer w0.24: J100.C5 103.806,36.78 103.074,36.048 103.074,35.102 103.632,34.544 104.648,34.544 105.182,35.078 105.182,38.857 105.169,38.87 105.169,39.35 104.895,39.624 J101.1
CAN3_N: J100.C9 J104.1 | length 3.4
  Top Layer w0.24: J100.C9 94.354,36.78 94.599,37.024 94.996,37.024 95.137,37.165 95.137,38.698 94.822,39.013 J104.1@94.772,39.013
  Bottom Layer w0.24: J100.C9 J100.C9@94.066,36.78
CAN3_P: J100.C8 J103.1 | length 3.3
  Top Layer w0.24: J103.1@95.82,39.013 95.77,39.013 95.504,38.746 95.504,37.165 95.645,37.024 95.941,37.024 96.186,36.78 J100.C8
  Bottom Layer w0.24: J100.C8@96.474,36.78 J100.C8
CANSW_N: D101.2 D111.2 J102.2 J104.2 P101.2 P103.2 | length 158.9
  Top Layer w0.24: J104.2@94.671,40.063 J104.2@94.721,40.063 ; J104.2 94.894,40.098 95.168,40.372 95.168,46.92 95.22,46.972 100.423,52.174 100.678,52.43 100.786,52.537 106.232,52.537 106.352,52.537 ccw(c106.352,52.911) 106.727,52.911 106.727,53.22 cw(c107.101,53.22) 107.475,53.22 107.475,52.911 ccw(c107.849,52.911) 108.224,52.911 cw(c108.598,52.911) 108.972,52.911 ccw(c109.346,52.911) 109.346,52.537 110.808,52.537 113.693,52.537 ccw(c113.693,52.778) 113.926,52.718 P103.2
  Bottom Layer w0.24: P101.2@73.275,115.76 73.034,115.519 72.412,115.519 72.257,115.365 72.257,115.158 72.81,114.606 73.326,114.09 73.326,113.749 73.477,113.598 73.822,113.598 74.102,113.318 D101.2 73.822,112.988 73.482,112.988 73.341,112.847 73.341,112.648 73.584,112.406 75.178,112.406 75.393,112.19 79.012,108.571 92.749,108.571 96.012,105.308 96.012,80.538 97.19,79.36 98.908,77.641 ccw(c99.173,77.906) 99.438,77.641 99.661,77.864 cw(c99.925,77.6) 100.19,77.864 cw(c99.925,77.6) 100.19,77.335 99.967,77.112 ccw(c100.232,76.848) 99.967,76.583 100.581,75.969 102.579,73.971 118.019,73.971 120.149,71.841 120.149,56.507 118.18,54.539 117.927,54.286 117.927,54.269 117.473,53.815 116.493,53.815 115.99,54.319 115.99,54.356 114.89,54.356 P103.2 112.464,53.618 D111.2 112.202,53.406 111.922,53.686 111.922,54.031 111.781,54.172 111.582,54.172 111.413,54.003 111.413,49.799 111.198,49.584 105.536,43.923 105.536,40.898 105.811,40.624 J102.2
CANSW_P: D101.1 D111.1 J101.2 J103.2 P101.7 P103.7 | length 158.9
  Top Layer w0.24: J103.2 95.81,40.098 95.535,40.372 95.535,46.767 95.588,46.82 100.938,52.17 113.693,52.17 ccw(c113.693,52.778) 113.951,52.227 114.65,52.555 ccw(c114.152,53.618) 115.022,52.829 P103.7
  Bottom Layer w0.24: P101.7@71.89,118.6 71.89,116.918 71.898,116.91 71.898,115.525 71.89,115.517 71.89,115.006 72.658,114.238 72.958,113.938 72.958,113.739 72.817,113.598 72.482,113.598 72.202,113.318 D101.1 72.482,112.988 72.827,112.988 72.974,112.842 72.974,112.496 73.431,112.038 75.026,112.038 78.86,108.204 92.597,108.204 95.645,105.156 95.645,80.386 97.019,79.011 100.918,75.112 102.427,73.603 117.867,73.603 119.781,71.689 119.781,56.659 118.02,54.898 117.097,54.898 P103.7 112.605,55.003 112.302,55.306 D111.1 112.202,55.306 111.922,55.026 111.922,54.681 111.781,54.54 111.43,54.54 111.045,54.155 111.045,49.951 105.169,44.075 105.169,40.898 104.895,40.624 J101.2
GND: C100.1 C101.1 C102.1 C103.1 D100.3 D101.3 D109.1 D110.3 D111.3 J100.A1 J100.A4 J100.A7 J100.A10 J100.A13 J100.A15 J100.A19 J100.A20 J100.A21 J100.A22 J100.A23 J100.A24 J100.A25 J100.A26 J100.A32 J100.C1 J100.C4 J100.C7 J100.C10 J100.C13 J100.C15 J100.C32 J105.2 J106.2 J107.2 P100.3 P100.6 P100.M1 P100.M2 P101.3 P101.6 P101.M1 P101.M2 P102.3 P102.6 P102.M1 P102.M2 P103.3 P103.6 P103.M1 P103.M2 pad.7 Q103.2 Q104.2 R101.1 R102.1 R106.1 R107.1 R108.1 | length 1.9
  Top Layer w0.254: Q104.2 64.492,49.234 66.252,49.234 Q103.2
  other v1: 28,28 36,28 92,28 96,28 100,28 104,28 108,28 112,28 116,28 30,32 34,32 118,32 122,32 51.308,33.528 52.832,33.528 54.356,33.528 55.88,33.528 57.404,33.528 58.928,33.528 60.452,33.528 61.976,33.528 63.5,33.528 65.024,33.528 66.548,33.528 52.324,34.544 53.848,34.544 55.372,34.544 56.896,34.544 58.42,34.544 59.944,34.544 61.468,34.544 62.992,34.544 64.516,34.544 66.04,34.544 67.564,34.544 28,36 32,36 52,36 100,36 108,36 116,36 30,40 34,40 38,40 42,40 46,40 50,40 54,40 58,40 62,40 66,40 94,40 98,40 102,40 110,40 114,40 118,40 28,44 32,44 40,44 44,44 48,44 52,44 56,44 60,44 64,44 68,44 84,44 92,44 100,44 104,44 108,44 112,44 120,44 30,48 34,48 38,48 46,48 50,48 58,48 62,48 66,48 94,48 98,48 102,48 106,48 114,48 118,48 28,52 84,52 92,52 96,52 120,52 94,56 98,56 102,56 106,56 110,56 118,56 28,60 84,60 53.34,60.452 74.168,60.452 54.864,60.96 72.644,60.96 75.692,60.96 38,64 46,64 50,64 94,64 98,64 102,64 106,64 110,64 114,64 118,64 28,68 84,68 92,68 96,68 100,68 104,68 108,68 112,68 51.308,68.072 51.308,71.12 94,72 98,72 102,72 106,72 110,72 114,72 118,72 28,76 52,76 56,76 76,76 80,76 84,76 92,76 96,76 104,76 108,76 112,76 120,76 78,80 82,80 94,80 98,80 102,80 106,80 110,80 118,80 26.924,82.296 68,84 92,84 100,84 104,84 108,84 112,84 116,84 120,84 107.366,86.36 94,88 98,88 102,88 106,88 118,88 56,92 92,92 100,92 104,92 112,92 120,92 94,96 98,96 102,96 106,96 109.118,96.012 118,96 122,96 56,100 92,100 100,100 108,100 112,100 116,100 120,100 26.416,100.076 94,104 98,104 102,104 106,104 110,104 122,104 28,108 32,108 36,108 40,108 56,108 60,108 64,108 68,108 72,108 76,108 96,108 100,108 104,108 108,108 112,108 116,108 120,108 104.394,109.22 73.152,110.515 97.536,110.769 65.024,110.82 30,112 34,112 58,112 66,112 70,112 78,112 82,112 86,112 90,112 94,112 102,112 110,112 114,112 118,112 122,112 28,116 32,116 40,116 44,116 48,116 52,116 80,116 96,116 112,116 120,116 34,120 38,120 42,120 46,120 50,120 54,120 70,120 74,120 78,120 82,120 86,120 94,120 98,120 102,120 106,120 110,120 114,120 118,120 32,124 36,124 40,124 44,124 48,124 52,124 56,124 60,124 64,124 68,124 72,124 76,124 80,124 84,124 88,124 92,124 96,124 100,124 104,124 108,124 112,124 116,124
GPIO_R_1: J100.C17
GPIO_R_2: J100.C18
GPIO_R_3: J100.C19
GPIO_R_4: J100.C20
GPIO_R_5: J100.C21
GPIO_R_6: J100.C22
GPIO_R_7: J100.C23
GPIO_R_8: J100.C24
GPIO_R_9: J100.C25
GPIO_R_10: J100.C26
GPIO_R_11: J100.C27
GPIO_R_12: J100.C28
GPIO_R_13: J100.C29
GPIO_R_14: J100.C30
GPIO_R_15: J100.C31
NetC100_2: C100.2 P100.5 | length 3.4
  Bottom Layer w0.254: P100.5 97.495,112.401 C100.2@97.536,112.36
NetC101_2: C101.2 P101.5 | length 3.4
  Bottom Layer w0.254: P101.5@64.965,115.76 64.965,112.419 C101.2@65.024,112.36
NetC102_2: C102.2 P102.5 | length 3.4
  Bottom Layer w0.254: C102.2@110.744,96.012 110.792,95.964 P102.5
NetC103_2: C103.2 P103.5 | length 2.8
  Bottom Layer w0.254: C103.2@111.344,61.976 111.392,61.928 P103.5
NetD100_1: D100.1 R111.1 | length 1.5
  Bottom Layer w0.254: R111.1 103.099,113.343 103.444,112.997 D100.1
NetD100_2: D100.2 R112.1 | length 1.6
  Bottom Layer w0.254: D100.2 105.344,112.947 105.766,113.368 R112.1
NetD102_1: D102.1 R102.2 | length 2.2
  Top Layer w0.254: R102.2@73.66,77 D102.1
NetD103_1: D103.1 R101.2 | length 2.3
  Top Layer w0.254: R101.2@70.866,47.663 D103.1
NetD104_1: D104.1 R105.2 | length 2.3
  Top Layer w0.254: D104.1 R105.2@66.802,46.228
NetD105_1: D105.1 Q104.1 | length 2.3
  Top Layer w0.254: D105.1 60.333,49.192 Q104.1
NetD105_2: D105.2 R100.1 | length 2
  Top Layer w0.254: D105.2 57.15,49.225 R100.1@57.15,47.282
NetD106_1: D106.1 R108.2 | length 2.6
  Top Layer w0.254: D106.1 71.412,78.922 R108.2@71.412,76.708
NetD106_2: D106.2 Q102.3 Q105.1 Q106.1 | length 24.4
  Top Layer w0.254: Q105.1 58.674,91.186 58.928,91.44 66.548,91.44 66.802,91.186 Q106.1 66.929,88.747 66.929,82.049 Q102.3 70.448,81.922 70.597,81.773 70.597,81.737 71.02,81.314 D106.2
NetD107_1: D107.1 R106.2 | length 2.6
  Top Layer w0.254: R106.2@53.848,46.99 D107.1
NetD108_1: D108.1 R107.2 | length 2.4
  Top Layer w0.254: R107.2@59.436,76.873 D108.1
NetD109_2: D109.2 R104.1 | length 1.7
  Top Layer w0.254: R104.1@63.284,76.708 D109.2
NetD110_1: D110.1 R110.1 | length 1.4
  Bottom Layer w0.254: D110.1 110.129,87.325 R110.1
NetD110_2: D110.2 R109.1 | length 1.4
  Bottom Layer w0.254: D110.2 110.134,85.42 R109.1
NetJ107_1: J107.1 ST101.1 ST103.1
NetQ100_1: Q100.1 Q101.1 Q103.1 Q104.3 R103.1 | length 31
  Top Layer w0.254: Q100.1 58.166,60.198 58.674,60.706 66.145,60.706 66.294,60.557 Q101.1 Q103.1 63.673,51.176 Q104.3@63.5,51.349 ; R103.1@58.928,47.282 58.928,50.136 59.077,50.285 63.351,50.285 63.5,50.433 Q104.3
NetQ100_4: Q100.4 Q101.4
NetQ102_1: Q102.1 R104.2 | length 6.9
  Top Layer w0.254: R104.2@61.684,76.708 61.684,78.956 62.35,79.622 Q102.1
NetQ103_3: Q103.3 R105.1 | length 4
  Top Layer w0.254: R105.1@68.402,46.228 68.494,46.32 Q103.3
NetQ105_4: Q105.4 Q106.4
"Unprotec 12v": D108.2 J105.1 Q102.2 Q105.3 ST100.1 | length 17.6
  Top Layer w0.254: D108.2 63.246,80.772 ; Q105.3 63.246,80.772 ; Q102.2 67.833,79.795 67.833,80.503 67.564,80.772 63.246,80.772
"Unprotec 24v": D104.2 D107.2 J106.1 Q100.3 R100.2 R103.2 ST102.1 | length 27.3
  Top Layer w0.254: D107.2 53.873,51.017 56.029,51.017 ; 61.877,45.682 59.563,45.682 58.928,45.682 58.039,45.682 57.15,45.682 56.029,45.682 55.88,45.831 55.88,50.868 56.029,51.017 ; Q100.3 62.484,58.14 62.484,51.166 62.335,51.017 56.029,51.017
pads on no net: J100. J100.A2 J100.A3 J100.A5 J100.A6 J100.A8 J100.A9 J100.C16 J105.S1 J105.S2 J106.S1 J106.S2 J107.S1 J107.S2 P100.1 P100.4 P100.8 P101.1 P101.4 P101.8 P102.1 P102.4 P102.8 P103.1 P103.4 P103.8

## Polygon pours and split planes (outlines as drawn)
GND on Top Layer "NONET_L01_P-001" (solid, pour order 37): 124.968,127 124.968,26.924 24.892,26.924 24.892,127
12v on Top Layer "NONET_L01_P-001" (solid, pour order 27): 68.58,90.932 68.58,83.82 90.424,83.82 90.424,90.932
24v on Top Layer "NONET_L01_P-001" (solid, pour order 0): 68.072,59.944 68.072,50.8 73.66,50.8 73.66,44.704 69.751,44.704 69.751,30.48 82.804,30.48 82.804,59.944
"Unprotec 24v" on Top Layer "NONET_L01_P-001" (solid, pour order 5): 41.148,90.673 29.972,90.673 29.972,90.932 30.48,91.44 30.988,90.932 31.496,91.44 32.004,90.932 32.512,91.44 33.02,90.932 33.528,91.44 34.036,90.932 34.544,91.44 35.052,90.932 35.56,91.44 36.068,90.932 36.576,91.44 37.084,90.932 37.592,91.44 38.1,90.932 38.608,91.44 39.116,90.932 39.624,91.44 40.132,90.932 40.64,91.44 41.148,90.932
"Unprotec 12v" on Top Layer "NONET_L01_P-001" (solid, pour order 6): 42.672,91.44 43.18,90.932 43.688,91.44 44.196,90.932 44.704,91.44 45.212,90.932 45.72,91.44 46.228,90.932 46.736,91.44 47.244,90.932 47.752,91.44 48.26,90.932 48.768,91.44 49.276,90.932 49.784,91.44 50.292,90.932 50.8,91.44 51.308,90.932 51.816,91.44 52.324,90.932 52.832,91.44 53.34,90.932 53.848,91.44 53.848,89.916 42.672,89.916
"Unprotec 24v" on Top Layer "NONET_L01_P-001" (solid, pour order 26): 48.768,50.801 62.859,50.652 62.992,50.785 62.992,52.324 64.008,52.324 64.008,59.944 59.436,59.944 59.436,56.388 56.896,56.388 56.896,59.944 48.768,59.944
"Unprotec 12v" on Top Layer "NONET_L01_P-001" (solid, pour order 25): 42.672,90.932 57.404,90.932 57.404,86.868 59.944,86.868 59.944,90.932 65.024,90.932 65.024,80.772 60.452,80.772 59.944,80.264 42.672,80.264
+12 on Top Layer "NONET_L01_P-001" (solid, pour order 21): 36.576,33.02 36.576,27 90.424,27 90.424,90.932 84.836,90.932 84.836,30.196 67.301,30.196 49.784,30.285 49.784,33.02
NetQ100_4 on Top Layer "NONET_L01_P-001" (solid, pour order 9): 82.804,73.152 82.804,61.468 52.324,61.468 52.324,73.152
"Unprotec 24v" on Top Layer "NONET_L01_P-001" (solid, pour order 15): 41.148,90.932 41.148,77.724 37.084,77.724 37.084,59.944 50.292,59.944 50.292,50.8 29.972,50.8 29.972,90.932
"Unprotec 12v" on Top Layer "NONET_L01_P-001" (solid, pour order 13): 42.672,90.932 42.672,76.708 38.1,76.708 38.1,67.564 50.292,67.564 50.292,90.932
NetJ107_1 on Top Layer "NONET_L01_P-001" (solid, pour order 11): 53.848,90.932 29.972,90.932 29.972,102.616 42.164,102.616 42.164,113.792 53.848,113.792
NetQ105_4 on Top Layer "NONET_L01_P-001" (solid, pour order 7): 90.424,91.948 57.404,91.948 57.404,104.14 90.424,104.14
GND on Bottom Layer "NONET_L01_P-001" (solid, pour order 36): 24.892,127 124.968,127 124.968,26.924 24.892,26.924
"Unprotec 24v" on Bottom Layer "NONET_L01_P-001" (solid, pour order 35): 41.148,90.932 41.148,81.28 29.972,81.28 29.972,90.932
"Unprotec 12v" on Bottom Layer "NONET_L01_P-001" (solid, pour order 34): 42.672,90.932 42.672,81.28 53.848,81.28 53.848,90.932
NetJ107_1 on Bottom Layer "NONET_L01_P-001" (solid, pour order 32): 29.972,102.616 29.972,92.456 53.848,92.456 53.848,102.616
no net on Top Solder "NONET_L01_P-001" (solid): 53.848,99.568 53.848,83.312 29.972,83.312 29.972,99.568

## Other copper
Top Layer:
  pour cut-out: 117.467,29.174 ccw(c119.407,29.174) 119.407,27.234 ccw(c119.407,29.174) 121.347,29.174 ccw(c119.407,29.174) 119.407,31.114 ccw(c119.407,29.174)
  pour cut-out: 28.56,29.16 ccw(c30.5,29.16) 30.5,27.22 ccw(c30.5,29.16) 32.44,29.16 ccw(c30.5,29.16) 30.5,31.1 ccw(c30.5,29.16)
  pour cut-out: 42.672,77.724 37.084,77.724 37.084,67.311 38.1,67.311 38.1,76.708 42.671,76.708 42.672,76.707
  pour cut-out: 41.148,76.71 41.148,91.544 41.13,91.562 41.145,91.577 42.672,91.577 42.672,76.707
Bottom Layer:
  pour cut-out: 32.4,29.204 cw(c30.46,29.204) 30.46,27.264 cw(c30.46,29.204) 28.52,29.204 cw(c30.46,29.204) 30.46,31.144 cw(c30.46,29.204)
  pour cut-out: 121.375,29.134 cw(c119.435,29.134) 119.435,27.194 cw(c119.435,29.134) 117.495,29.134 cw(c119.435,29.134) 119.435,31.074 cw(c119.435,29.134)
  pour cut-out: 29.972,92.456 29.972,90.932 41.148,90.932 41.148,81.28 42.672,81.28 42.672,90.932 53.594,90.932 53.594,92.456
  pour cut-out: 53.594,79.756 55.372,79.756 55.372,104.14 53.594,104.14
  pour cut-out: 29.972,79.756 55.372,79.756 55.372,81.28 29.972,81.28
  pour cut-out: 28.448,102.616 29.972,102.616 29.972,79.756 28.448,79.756
  pour cut-out: 55.372,104.14 28.448,104.14 28.448,102.616 55.372,102.616

## Silkscreen, mask and mechanical layers (free items; w line width, h text height)
Top Overlay:
  lines w0.254: 31.496,80.772 29.464,80.772 29.464,101.6 32.004,101.6 ; 40.538,106.934 41.554,107.95 41.554,104.14 ; 42.824,104.14 42.824,107.95 43.84,106.934 ; 44.679,56.159 47.727,56.159 ; 45.034,72.161 48.082,72.161 ; 46.203,54.635 46.203,57.683 ; 46.558,70.637 46.558,73.685 ; 51.816,81.026 54.356,81.026 54.356,101.346 52.248,101.346 ; 64.008,42.672 64.008,43.688 ; 65.024,43.688 64.008,43.688 ; 70.612,41.148 66.548,41.148 64.008,43.688 ; 71.12,83.82 71.12,82.804 ; 72.136,82.804 71.12,82.804 ; 74.72,85.597 74.719,85.598 73.914,85.598 71.12,82.804 ; 80.289,100.152 102.133,100.152 ; 102.413,67.716 102.413,67.818 ; 52.324,44.196 52.324,59.944 56.171,59.944 56.171,44.196 52.324,44.196 ; 55.372,73.66 60.452,73.66 60.452,81.788 55.372,81.788 55.372,73.66 ; 69.636,44.899 75.475,44.899 75.475,53.027 69.636,53.027 69.636,44.899 ; 72.392,73.66 72.392,81.788 78.232,81.788 78.232,73.66 72.392,73.66 ; 77.724,39.116 78.232,39.116 78.232,39.624 77.724,39.624 77.724,39.116 ; 77.724,40.132 78.232,40.132 78.232,41.656 77.724,41.656 77.724,40.132 ; 81.788,82.296 81.788,82.804 82.296,82.804 82.296,82.296 81.788,82.296 ; 81.788,83.312 81.788,84.836 82.296,84.836 82.296,83.312 81.788,83.312
  text "CAN 2/3" at 89.068,108.423 h4
  text "CAN 1" at 62.043,108.347 h4
  text "ARIADNA" at 80.264,100.863 h6
  text "VIN" at 32.807,100.397 h3
  text "VIN" at 43.551,100.32 h3
  text "CAN 1" at 106.416,99.781 h4 r270
  text "MODULAR SYSTEM" at 79.629,98.018 h3
  text "ERROR" at 75.438,85.598 h1.52
  text "CHECK" at 75.438,84.074 h0.8
  text "VOLTAGE" at 75.438,82.55 h0.8
  text "12v" at 43.297,79.238 h3
  text "24v" at 31.969,79.188 h3
  text "12v in" at 56.769,74.32 h1 r90
  text "12v out" at 77.728,74.167 h1 r90
  text "CAN 2/3" at 106.264,70.545 h4 r270
  text "12v" at 47.819,60.369 h3 r90
  text "24v in" at 54.61,53.086 h1 r90
  text "24v out" at 74.972,45.407 h1 r90
  text "24v" at 47.787,43.399 h3 r90
  text "ERROR" at 71.374,42.418 h1.52
  text "CHECK" at 71.374,40.894 h0.8
  text "VOLTAGE" at 71.374,39.37 h0.8
Bottom Overlay:
  circle w0.254: c58.725,102.133 r0.424
  lines w0.254: 58.164,103.631 57.764,103.631 57.764,98.809 64.11,98.809 ; 64.11,98.4 57.764,98.4 57.764,96.088 73.965,96.088 ; 73.965,95.529 57.795,95.529 57.795,85.877 76.886,85.877 76.886,95.656 76.124,95.656 ; 76.135,96.092 76.864,96.092 76.864,98.381 76.864,98.567 76.281,98.567 ; 76.276,98.94 76.864,98.94 76.864,103.631 76.364,103.631 ; 80.645,99.365 84.29,103.01 ; 82.093,100.66 83.083,101.651 83.109,101.651 85.954,98.806 85.979,98.806 ; 82.118,100.66 84.963,97.815 ; 82.207,94.959 84.2,96.953 ; 84.176,96.926 87.084,99.835 ; 84.239,96.863 95.91,85.192 96.368,84.734 96.418,84.734 ; 87.903,99.016 87.903,103.753 90.602,101.054 90.602,101.143 93.066,103.607 93.066,94.005 ; 87.909,93.193 87.909,84.303 91.516,87.909 91.516,80.874 ; 88.951,83.363 93.955,78.359 98.755,83.16 ; 89.077,101.829 87.084,99.836 87.084,99.835 ; 94.005,92.913 94.005,92.964 94.082,92.964 96.698,95.58 96.698,90.195 97.053,89.84 ; 96.418,80.874 96.418,84.734 ; 97.46,85.623 97.485,85.623 99.39,83.718 99.644,83.718 100.406,84.48 98.4,86.487 98.374,86.487 ; 99.314,87.63 99.289,87.63 ; 100.025,84.099 100.025,84.074 102.565,81.534 ; 87.084,99.835 88.722,98.196 99.289,87.63 ; 96.418,84.734 99.289,87.605 99.289,87.63
  text "ARIADNA MODULAR SYSTEM" at 75.924,103.222 h0.8
  text "POWER INJECTOR BOARD" at 75.87,101.371 h0.8
  text "B: N/A PRJ: REV A" at 75.87,99.847 h0.8
  text "Project Author:" at 75.794,98.311 h0.8
  text "ARTEM HORIUNOV" at 75.768,96.901 h0.8
  text "QC" at 75.743,95.529 h0.8
  text "BRD" at 90.521,91.41 h2.8 r315.37
  text "POWER" at 95.578,88.98 h1 r315.37
  text "INJECTOR" at 96.365,85.627 h1 r315.37
  text ".ModifiedDate" at 75.73,83.797 h1.52
Mechanical 1:
  lines w0.025: 25,27 125,27

## Text inside footprints (layer, text, board x,y; h text height)
P100: Mechanical 2 "PCB Edge" at 106.435,128.3 h1.02 r180
P101: Mechanical 2 "PCB Edge" at 73.915,128.319 h1.02 r180
P102: Mechanical 2 "PCB Edge" at 126.692,87.024 h1.02 r90
P103: Mechanical 2 "PCB Edge" at 126.692,52.988 h1.02 r90